# EAGLE board WS2811Controller (EAGLE 6.4)
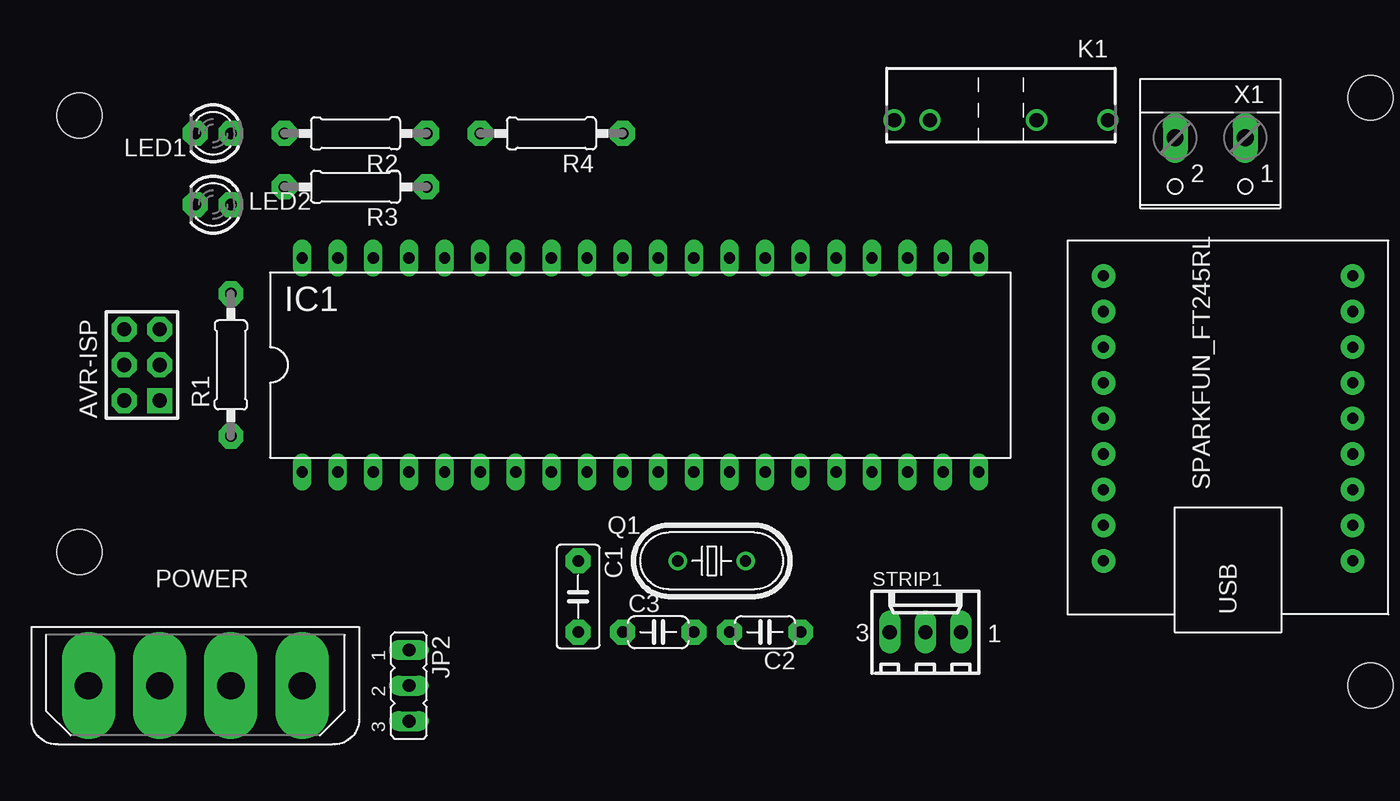
[diagram p0: board, top side]
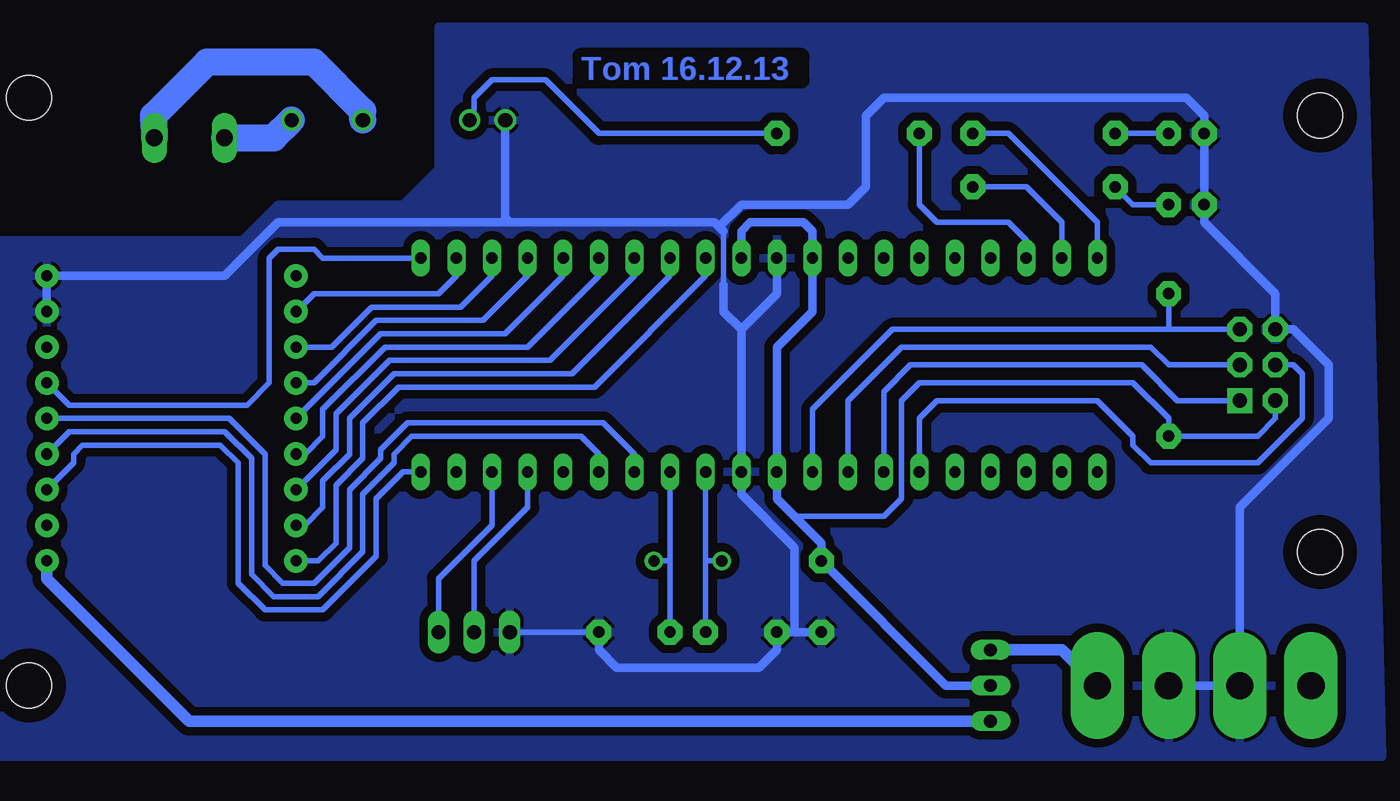
[diagram p1: board, bottom side, seen from below]

No outline drawn. Coordinates in mm, seen from the top.
Copper layers (1*16): Top 0.035mm / dielectric 1.5mm / Bottom 0.035mm
Design rules "default": minimum track width 10mil, minimum drill 24mil, track to track 8mil, track to pad 8mil, pad to pad 8mil, via to via 8mil, smd to smd 8mil, copper to edge 40mil, drill to drill 8mil, minimum pad ring 10mil, minimum via ring 8mil, stop-mask expansion 4mil, vias tented up to drill 0mil, thermal gap 10mil
Holes 3.2 mm at 4.45,14.61 4.45,45.72 96.52,5.08 96.52,46.99

## Footprints (pad centres in the part's own frame; a part is rotated, then mirrored left to right if it is on the bottom)
AVR-ISP-6 = drill 1.016 pad 1.778 square: 1 -2.54,-1.27 | drill 1.016 pad 1.778 octagon: 2 -2.54,1.27; 3 0,-1.27; 4 0,1.27; 5 2.54,-1.27; 6 2.54,1.27
C050-030X075 = drill 0.813 pad 1.778 octagon: 1 -2.54,0; 2 2.54,0
C050-024X044 = drill 0.813 pad 1.778 octagon: 1 -2.54,0; 2 2.54,0
DIL40 = drill 0.813 long: 1 -24.13,-7.62; 2 -21.59,-7.62; 3 -19.05,-7.62; 4 -16.51,-7.62; 5 -13.97,-7.62; 6 -11.43,-7.62; 7 -8.89,-7.62; 8 -6.35,-7.62; 9 -3.81,-7.62; 10 -1.27,-7.62; 11 1.27,-7.62; 12 3.81,-7.62; 13 6.35,-7.62; 14 8.89,-7.62; 15 11.43,-7.62; 16 13.97,-7.62; 17 16.51,-7.62; 18 19.05,-7.62; 19 21.59,-7.62; 20 24.13,-7.62; 21 24.13,7.62; 22 21.59,7.62; 23 19.05,7.62; 24 16.51,7.62; 25 13.97,7.62; 26 11.43,7.62; 27 8.89,7.62; 28 6.35,7.62; 29 3.81,7.62; 30 1.27,7.62; 31 -1.27,7.62; 32 -3.81,7.62; 33 -6.35,7.62; 34 -8.89,7.62; 35 -11.43,7.62; 36 -13.97,7.62; 37 -16.51,7.62; 38 -19.05,7.62; 39 -21.59,7.62; 40 -24.13,7.62
JP2 = drill 0.914 long: 1 -2.54,0; 2 0,0; 3 2.54,0
S2XXEX = drill 1: 1 -7.62,0; 2 -2.54,0; 3 5.08,0; 4 7.62,0
LED3MM = drill 0.813 pad 1.778 octagon: A -1.27,0; K 1.27,0
FLOPPY-4 = drill 1.93 pad 3.81 long: 1 7.62,0; 2 2.54,0; 3 -2.54,0; 4 -7.62,0
HC49U70 = drill 0.813: 1 -2.413,0; 2 2.413,0
0207/10 = drill 0.813 pad 1.778 octagon: 1 -5.08,0; 2 5.08,0
SPARKFUN_FT245RL_BOARD = drill 0.8 pad 1.676: D0 7.62,8.89; D1 5.08,8.89; D2 2.54,8.89; D3 0,8.89; D4 -2.54,8.89; D5 -5.08,8.89; D6 -7.62,8.89; D7 -10.16,8.89; GND1 7.62,-8.89; GND2 10.16,-8.89; PWEN 5.08,-8.89; RD 2.54,-8.89; RXF -2.54,-8.89; TXE -5.08,-8.89; V3.3 -7.62,-8.89; VCCIO 10.16,8.89; VUSB -10.16,-8.89; WR 0,-8.89
6410-03 = drill 1.016 long: 1 2.54,0; 2 0,0; 3 -2.54,0
W237-102 = drill 1.194 long: 1 -2.5,-1.27; 2 2.5,-1.27

## Placement (x,y rotation side)
AVR-ISP  [AVR-ISP-6]  8.89,27.94 90 top
C1  100nF  [C050-030X075]  40.01,11.43 270 top
C2  22pf  [C050-024X044]  53.34,8.89 180 top
C3  22pf  [C050-024X044]  45.72,8.89 0 top
IC1  MEGA164P/324P/644P-PU  [DIL40]  44.45,27.94 0 top
JP2  [JP2]  27.94,5.08 270 top
K1  S216SE1  [S2XXEX]  70.17,45.4 180 top
LED1  [LED3MM]  13.97,44.45 180 top
LED2  [LED3MM]  13.97,39.37 180 top
POWER  [FLOPPY-4]  12.7,5.08 180 top
Q1  20Mhz  [HC49U70]  49.53,13.97 180 top
R1  10k  [0207/10]  15.24,27.94 90 top
R2  330  [0207/10]  24.13,44.45 180 top
R3  330  [0207/10]  24.13,40.64 180 top
R4  330  [0207/10]  38.1,44.45 180 top
SPARKFUN_FT245RL  FT245RL_BREAKOUTBOARD  [SPARKFUN_FT245RL_BOARD]  86.36,24.13 90 top
STRIP1  [6410-03]  64.77,8.89 0 top
X1  [W237-102]  85.09,42.86 180 top

## Library data of the parts
AVR-ISP IC1 = 0_avr
C1-C3 R1-R4 = 0_Standard-Parts
JP2 = jumper
K1 = relay; OC_FARNELL: unknown; OC_NEWARK: unknown
LED1 LED2 = 0_Led
POWER = con-amp; OC_FARNELL: unknown; OC_NEWARK: unknown
Q1 = crystal
SPARKFUN_FT245RL = Sparkfun
STRIP1 = con-molex; OC_FARNELL: unknown; OC_NEWARK: unknown
X1 = con-wago-500; MPN: 237-102; OC_FARNELL: unknown; OC_NEWARK: 70K9898

## Nets
+5V: AVR-ISP.2 C1.1 IC1.10 IC1.30 IC1.32 JP2.2 R1.1
GND: AVR-ISP.6 C1.2 C2.1 C3.1 IC1.11 IC1.31 K1.4 LED1.K LED2.K POWER.2 POWER.3 SPARKFUN_FT245RL.GND1 SPARKFUN_FT245RL.GND2 STRIP1.3
N$1: AVR-ISP.3 IC1.8
N$2: AVR-ISP.1 IC1.7
N$3: IC1.40 R2.1
N$4: AVR-ISP.5 IC1.9 R1.2
N$5: AVR-ISP.4 IC1.6
N$6: IC1.39 R3.1
N$7: IC1.22 SPARKFUN_FT245RL.D0
N$8: C2.2 IC1.13 Q1.1
N$9: C3.2 IC1.12 Q1.2
N$10: IC1.23 SPARKFUN_FT245RL.D1
N$11: IC1.24 SPARKFUN_FT245RL.D2
N$12: IC1.25 SPARKFUN_FT245RL.D3
N$13: IC1.26 SPARKFUN_FT245RL.D4
N$14: IC1.27 SPARKFUN_FT245RL.D5
N$15: IC1.28 SPARKFUN_FT245RL.D6
N$16: IC1.29 SPARKFUN_FT245RL.D7
N$17: IC1.20 SPARKFUN_FT245RL.TXE
N$18: IC1.15 SPARKFUN_FT245RL.RXF
N$19: IC1.21 SPARKFUN_FT245RL.RD
N$20: IC1.14 SPARKFUN_FT245RL.WR
N$21: LED1.A R2.2
N$22: LED2.A R3.2
N$23: IC1.18 STRIP1.1
N$24: JP2.1 POWER.4
N$25: IC1.17 STRIP1.2
N$26: K1.2 X1.1
N$27: K1.1 X1.2
N$28: IC1.38 R4.2
N$29: K1.3 R4.1
N$30: JP2.3 SPARKFUN_FT245RL.VUSB
VCCIO: SPARKFUN_FT245RL.VCCIO

## Tracks (layer width: path | path; a pad name or v marks a point on that pad's centre or on a via)
+5V
  Bottom 0.406: AVR-ISP.2 7.62,24.13 8.89,22.86 R1.1 15.24,24.13 17.78,26.67 33.02,26.67 34.29,25.4 34.29,18.41 35.56,17.14 41.91,17.14
  Bottom 0.61: IC1.30 45.72,37.47 45.09,38.1 41.27,38.1 40.64,37.47 IC1.32 40.64,31.75 43.18,29.21 IC1.10 43.18,18.41 41.91,17.14 40.01,15.24 C1.1 31.11,5.08 JP2.2
GND
  Bottom 0.406: C2.1 STRIP1.3 | 46.99,33.66 46.99,37.47
  Bottom 0.61: 45.72,30.48 IC1.11 45.72,18.73 41.91,14.92 41.91,8.89 | IC1.31 43.18,33.02 45.72,30.48 | 41.91,8.89 C3.1 43.18,7.62 44.45,6.35 54.61,6.35 55.88,7.62 C2.1 | C1.2 41.91,8.89 | SPARKFUN_FT245RL.GND1 SPARKFUN_FT245RL.GND2 82.55,34.29 78.74,38.1 62.23,38.1 | POWER.3 POWER.2 10.16,17.78 3.81,24.13 3.81,27.94 6.35,30.48 AVR-ISP.6 7.62,33.02 12.7,38.1 LED2.K LED1.K 12.7,45.72 13.97,46.99 35.56,46.99 36.83,45.72 36.83,40.64 38.1,39.37 45.72,39.37 47.31,37.78 | 45.72,30.48 46.99,31.75 46.99,33.66 | 62.23,38.1 47.62,38.1 47.31,37.78 | 47.31,37.78 46.99,37.47 | K1.4 62.55,38.42 62.23,38.1
  pour Bottom (isolate 0.61): 0,0 1.27,52.07 67.31,52.07 67.31,41.91 69.85,39.37 78.74,39.37 81.28,36.83 100.33,36.83 100.33,0
N$1
  Bottom 0.406: AVR-ISP.3 15.24,27.94 16.51,29.21 34.29,29.21 38.1,25.4 IC1.8
N$2
  Bottom 0.406: AVR-ISP.1 14.61,25.4 17.14,27.94 33.66,27.94 35.56,26.04 IC1.7
N$3
  Bottom 0.406: IC1.40 20.32,38.1 26.67,44.45 R2.1
N$4
  Bottom 0.406: IC1.9 40.64,24.77 34.92,30.48 15.24,30.48 | AVR-ISP.5 15.24,30.48 | R1.2 15.24,30.48
N$5
  Bottom 0.406: AVR-ISP.4 6.35,27.94 5.71,27.3 5.71,24.13 8.89,20.95 16.51,20.95 17.78,22.23 17.78,22.86 20.32,25.4 31.75,25.4 33.02,24.13 IC1.6
N$6
  Bottom 0.406: IC1.39 22.86,38.1 25.4,40.64 R3.1
N$7
  Bottom 0.406: IC1.22 66.04,34.29 67.31,33.02 76.2,33.02 SPARKFUN_FT245RL.D0
N$8
  Bottom 0.406: C2.2 50.8,13.97 | 50.8,13.97 IC1.13 | Q1.1 50.8,13.97
N$9
  Bottom 0.406: IC1.12 48.26,13.97 | 48.26,13.97 C3.2 | Q1.2 48.26,13.97
N$10
  Bottom 0.406: IC1.23 63.5,34.29 65.72,32.07 72.07,32.07 74.93,29.21 SPARKFUN_FT245RL.D1
N$11
  Bottom 0.406: IC1.24 60.96,34.29 64.14,31.11 71.75,31.11 76.2,26.67 SPARKFUN_FT245RL.D2
N$12
  Bottom 0.406: IC1.25 58.42,34.29 62.55,30.16 71.44,30.16 SPARKFUN_FT245RL.D3 76.83,24.13
N$13
  Bottom 0.406: IC1.26 55.88,34.29 60.96,29.21 71.12,29.21 75.56,24.77 75.56,22.86 76.83,21.59 SPARKFUN_FT245RL.D4
N$14
  Bottom 0.406: IC1.27 53.34,34.29 59.37,28.26 70.8,28.26 74.61,24.45 74.61,21.91 SPARKFUN_FT245RL.D5 76.83,19.05
N$15
  Bottom 0.406: IC1.28 50.8,34.29 57.78,27.3 70.48,27.3 73.66,24.13 73.66,21.59 75.56,19.68 75.56,17.78 76.83,16.51 SPARKFUN_FT245RL.D6
N$16
  Bottom 0.406: IC1.29 48.26,34.29 56.2,26.35 70.17,26.35 72.71,23.81 72.71,21.27 74.61,19.37 74.61,15.24 75.88,13.97 SPARKFUN_FT245RL.D7
N$17
  Bottom 0.406: SPARKFUN_FT245RL.TXE 93.34,20.95 93.34,21.59 92.71,22.23 82.87,22.23 81.6,20.95 81.6,12.38 79.69,10.48 75.56,10.48 71.75,14.29 71.75,18.41 69.85,20.32 IC1.20
N$18
  Bottom 0.406: SPARKFUN_FT245RL.RXF 93.66,23.18 82.55,23.18 80.64,21.27 80.64,13.02 79.06,11.43 75.88,11.43 72.71,14.61 72.71,18.73 70.48,20.95 70.48,21.59 69.22,22.86 57.15,22.86 55.88,21.59 IC1.15
N$19
  Bottom 0.406: IC1.21 75.56,35.56 76.2,36.2 78.74,36.2 79.38,35.56 79.38,26.67 80.96,25.08 93.66,25.08 SPARKFUN_FT245RL.RD
N$20
  Bottom 0.406: SPARKFUN_FT245RL.WR 82.23,24.13 79.69,21.59 79.69,13.65 78.42,12.38 76.2,12.38 73.66,14.92 73.66,19.05 71.44,21.27 71.44,21.91 69.53,23.81 55.56,23.81 53.34,21.59 IC1.14
N$21
  Bottom 0.406: LED1.A R2.2
N$22
  Bottom 0.406: LED2.A 17.78,39.37 R3.2
N$23
  Bottom 0.406: IC1.18 63.5,16.51 67.31,12.7 STRIP1.1
N$24
  Bottom 0.813: POWER.4 22.86,7.62 JP2.1
N$25
  Bottom 0.406: STRIP1.2 64.77,13.97 60.96,17.78 IC1.17
N$26
  Bottom 1.27: 87.63,45.72 87.63,45.44
  Bottom 1.93: K1.2 72.71,46.04 76.2,49.53 83.82,49.53 87.63,45.72 | 87.63,45.44 X1.1
N$27
  Bottom 1.93: X1.2 79.06,44.13 K1.1
N$28
  Bottom 0.406: IC1.38 25.4,36.83 26.67,38.1 31.75,38.1 33.02,39.37 R4.2
N$29
  Bottom 0.406: R4.1 55.88,44.45 59.69,48.26 63.5,48.26 64.77,46.99 64.77,45.72 K1.3
N$30
  Bottom 0.813: JP2.3 85.09,2.54 95.25,12.7 SPARKFUN_FT245RL.VUSB

## Text on the board
Bottom: Tom 16.12.13
tDocu: +12V GND GND +5V